# Altium PCB GRLV_Double_30v_v0.3.PcbDoc
Units mil, origin at the board's own origin, x right, y up, seen from the top; angles counter-clockwise.
Board outline 6000 x 4000 mil, 2 copper layers (Top Layer, Bottom Layer); 88 components, 45 nets, 217 pads, 0 vias.
Unrouted connection lines stored in the file: 142.
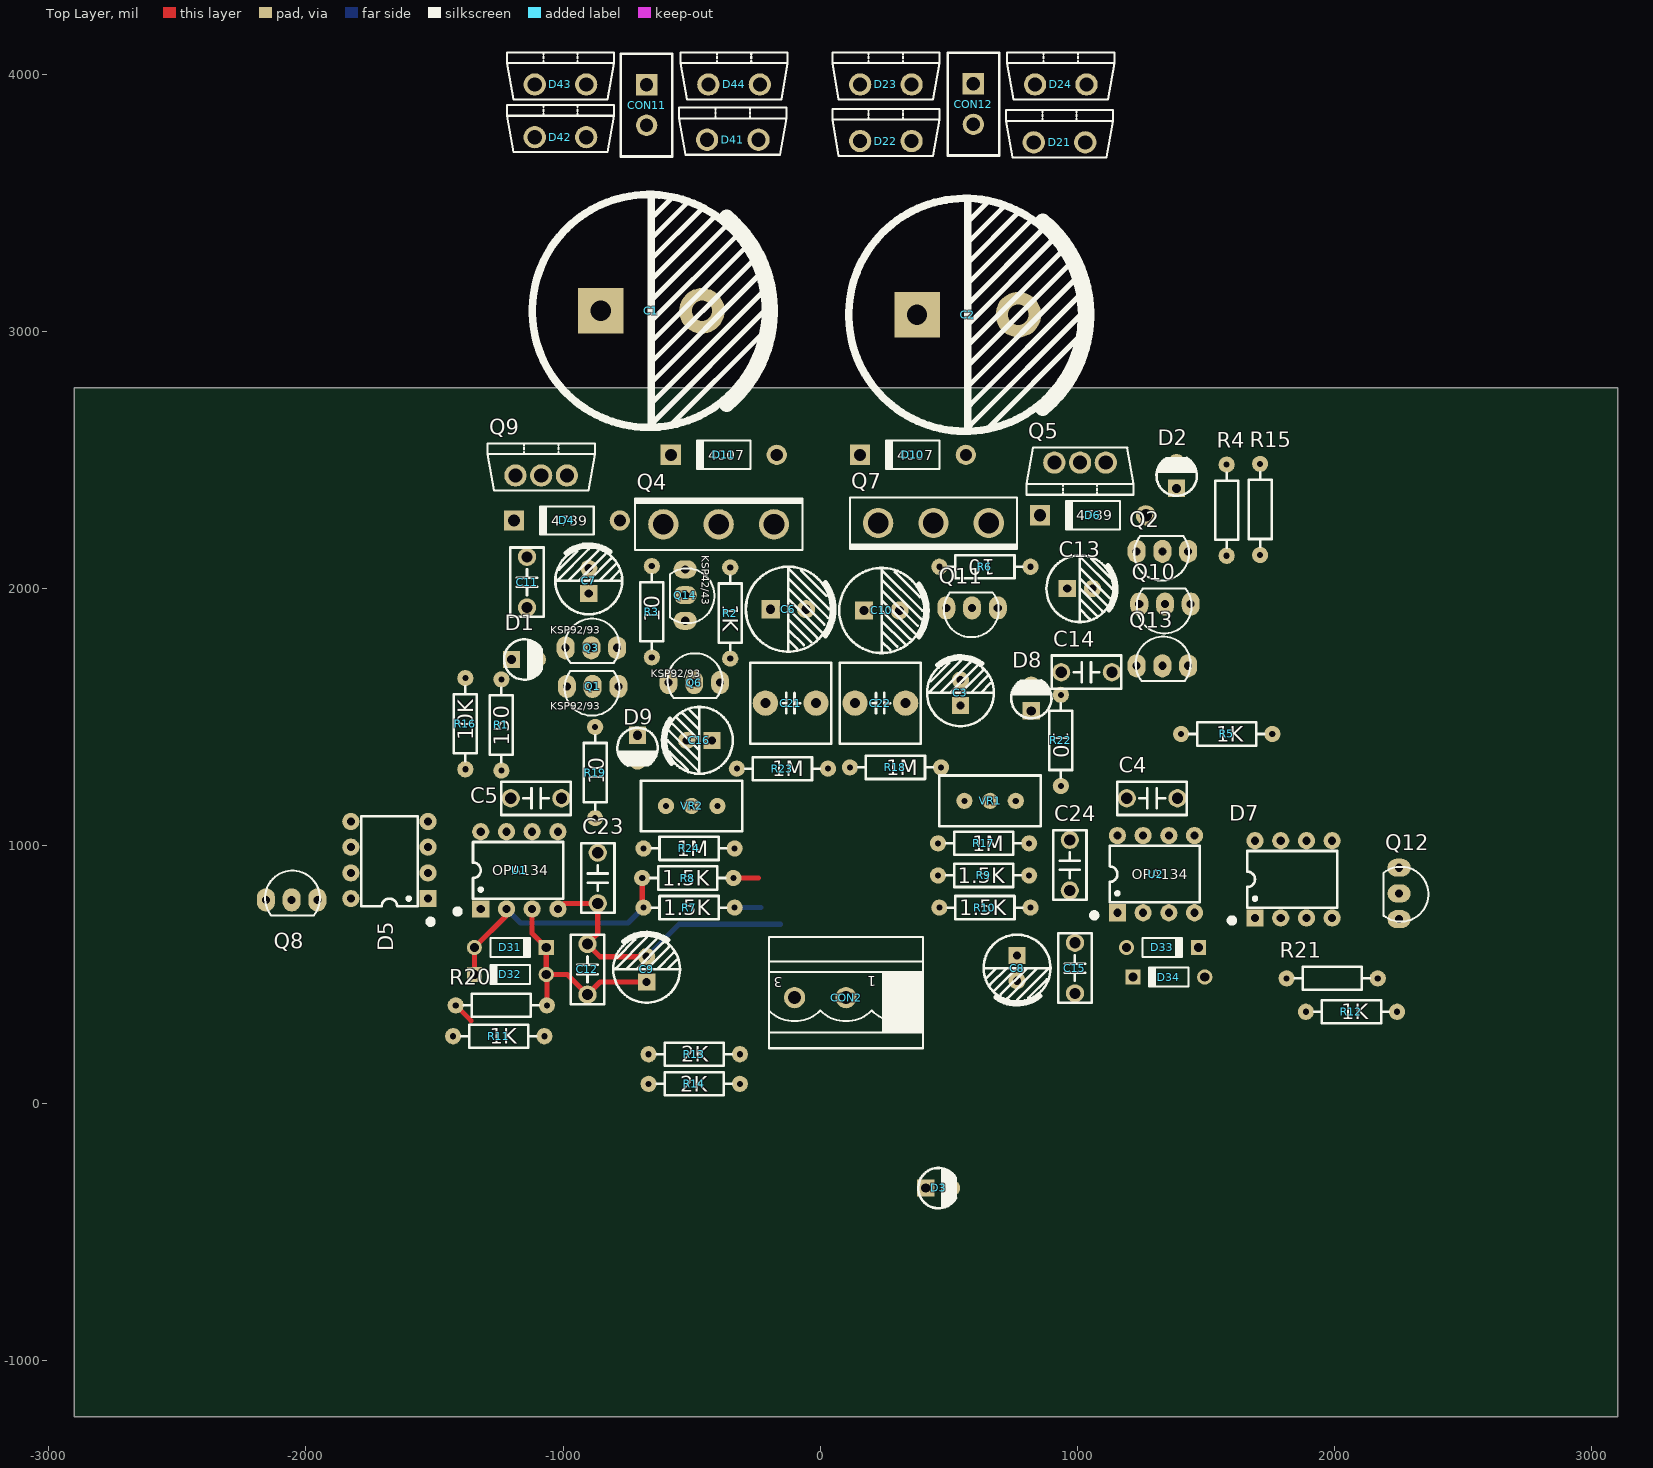
[diagram p0: Top Layer view]
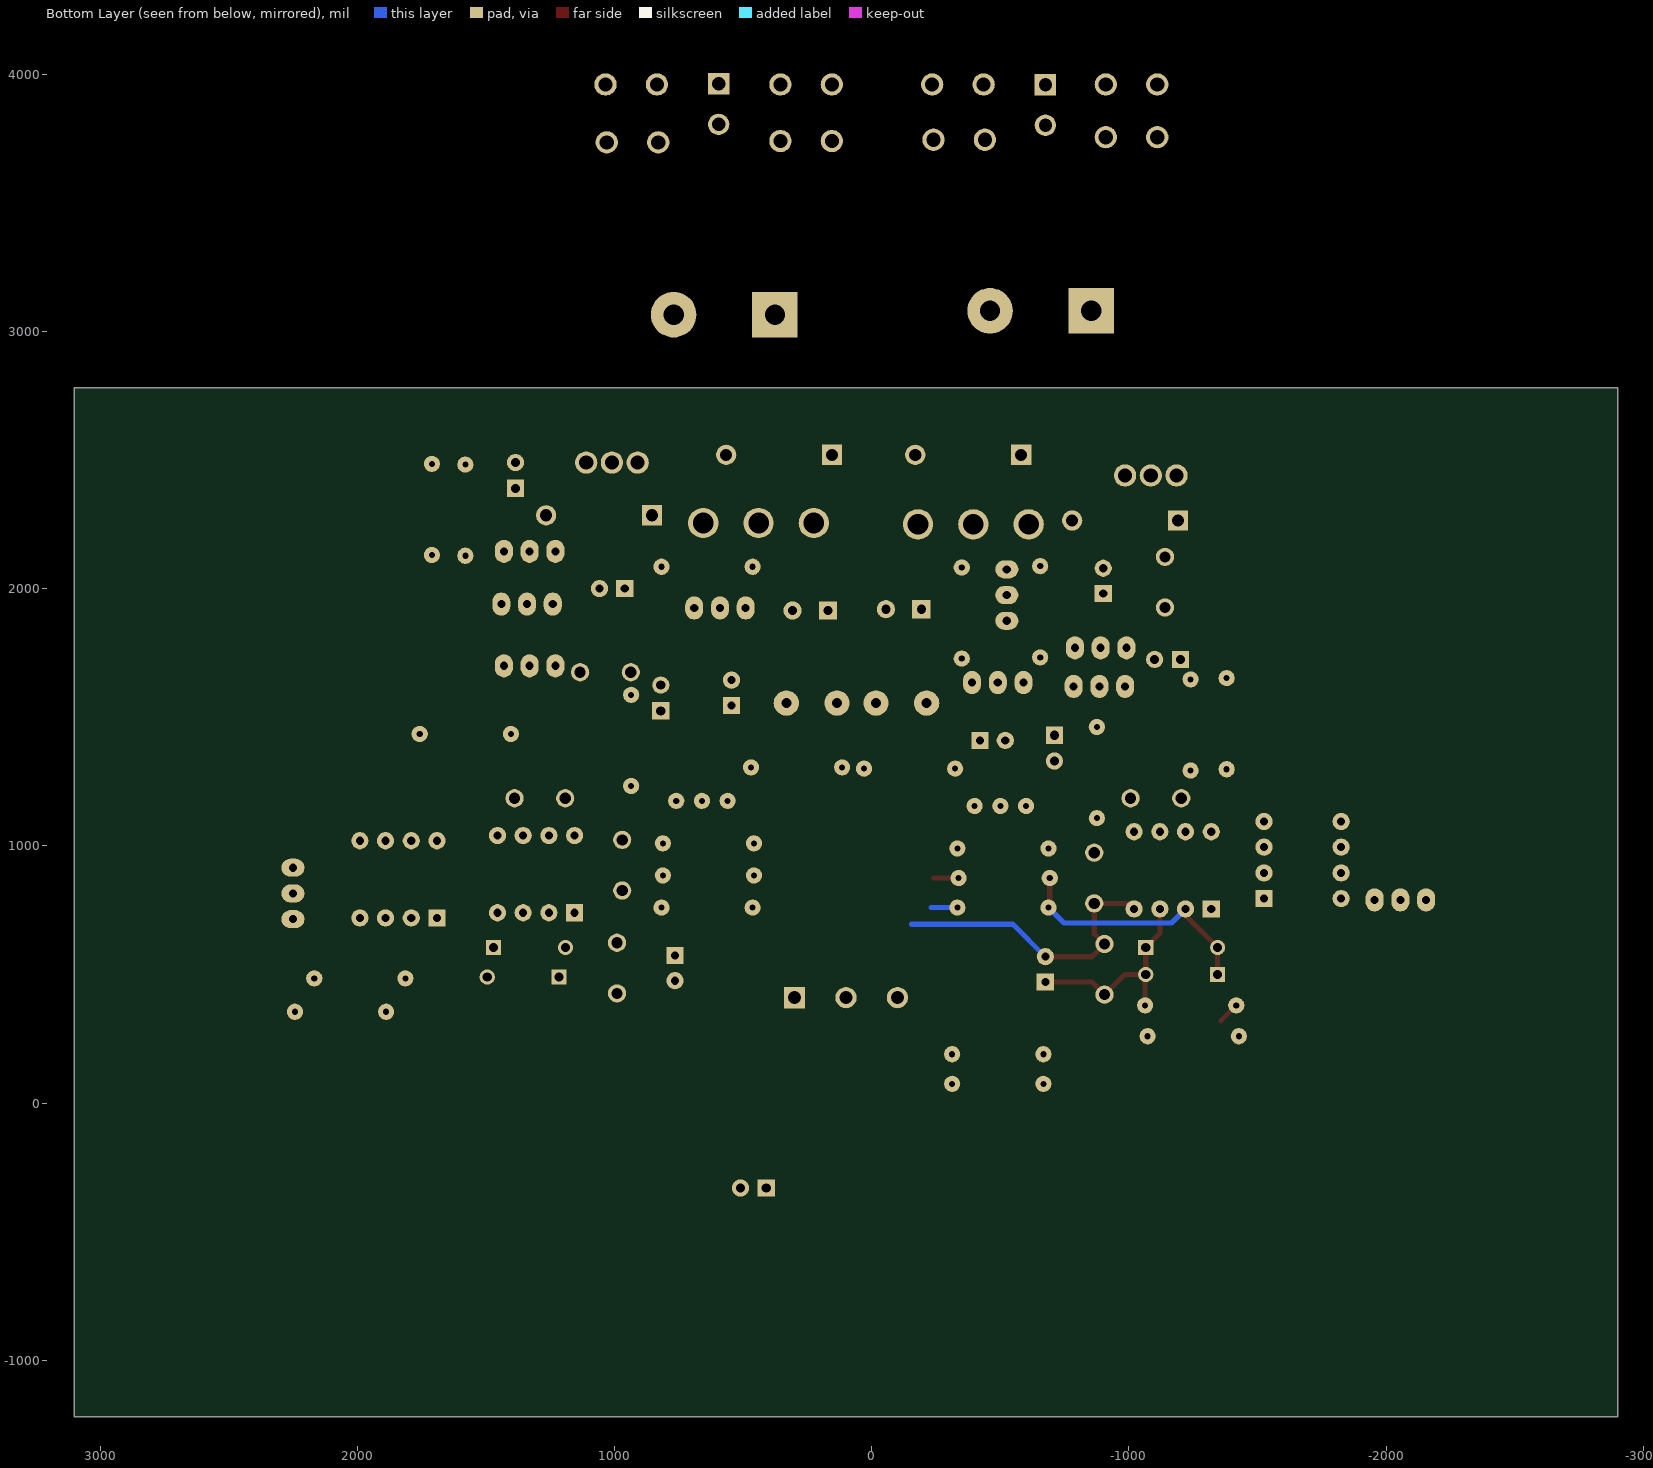
[diagram p1: Bottom Layer view, seen from below]

## Layer stack, top to bottom
Top Solder: solder mask 0.4, Solder Resist, Dk 3.5
Top Layer: signal copper 1.4
Dielectric 1: dielectric 12.6, FR-4, Dk 4.8
Bottom Layer: signal copper 1.4
Bottom Solder: solder mask 0.4, Solder Resist, Dk 3.5

## Board outline
-2900,-1220 3100,-1220 3100,2780 -2900,2780

## Design rules (kind name [scope] priority, off if disabled: settings)
Clearance [All] p1: gap=10 ignorepadtopadclearanceinfootprint=FALSE except(0: Arc-Hole Track-Hole SMDPad-Hole THPad-Hole Via-Hole Fill-Hole Poly-Hole Region-Hole Text-Hole)
PolygonConnect [All] p1: connectstyle=Relief reliefconductorwidth=10 reliefentries=4 polygonreliefangle="90 Angle" airgapwidth=10
RoomDefinition GRLV_double_30v_v0.3 [InComponentClass('GRLV_double_30v_v0.3')] p1: confinementstyle=ConfineIn formatcopy=TRUE lockcomponents=FALSE outline 3145,-1160 19565,-1160 19565,1930 3145,1930
RoutingVias [All] p1: holewidth=28 width=50 viastyle="Through Hole" minholewidth=28 minwidth=50 maxholewidth=28 maxwidth=50
SolderMaskExpansion [All] p1: expansion=4
Width [All] p1: maxlimit=100 minlimit=10 preferedwidth=20
30 further rules are at their usual default settings.

## Components (designator, comment, footprint, x,y, rotation, side; value= is the part's Value field where it differs from the comment)
C1 "4700UF/35V" "CAP 10*22*31.5" -656.85,3080 r0 top
C2 "4700UF/35V" "CAP 10*22*31.5" 573.15,3065 r0 top
C3 "10UF/16V" "CAP 2.5*6.3*7" 545,1595 r90 top
C4 "47pF/275V" "CBB 6.3*6.3*5" 1290,1185 r0 top
C5 "47pF/275V" "CBB 6.3*6.3*5" -1105,1185 r180 top
C6 "10UF/16V" "CAP 3.5*8*11.5" -123.9,1920 r0 top
C7 "10UF/16V" "CAP 2.5*6.3*11.2" -900,2030 r90 top
C8 "10UF/16V" "CAP 2.5*6.3*7" 765,525 r270 top
C9 "10UF/16V" "CAP 2.5*6.3*7" -675,520 r90 top
C10 "10UF/16V" "CAP 3.5*8*11.5" 238.9,1915 r0 top
C11 "0.1uF/275V" "CBB 6.3*6.3*5" -1140,2025 r90 top
C12 "0.1uF/275V" "CBB 6.3*6.3*5" -905,520 r90 top
C13 "10UF/16V" "CAP 2.5*6.3*11.2" 1009.21,2000 r0 top
C14 "0.1uF/275V" "CBB 6.3*6.3*5" 1035,1675 r0 top
C15 "0.1uF/275V" "CBB 6.3*6.3*5" 990,525 r90 top
C16 "10UF/16V" "CAP 2.5*6.3*7" -470,1410 r180 top
C21 "4.7uf/63v" "CBB 7.2*7.2*13" -115,1555 r0 top
C22 "4.7uf/63v" "CBB 7.2*7.2*13" 233.43,1555 r0 top
C23 "0.01uF/275V" "CBB 6.3*6.3*5" -865,875 r90 top value=0.01uF
C24 "0.01uF/275V" "CBB 6.3*6.3*5" 970,925 r90 top value=0.01uF
CON2 "EDG5.08-3P" HX5.08-3S 300,410 r180 top
CON11 "AC220-2" HX4.0-2XS -675,3880 r270 top
CON12 "AC220-2" HX4.0-2XS 595,3883.74 r270 top
D1 "ValueValueAux" "LED 3MM-R" -1150,1725 r0 top
D2 "ValueValueAux" "LED 3MM-R" 1385,2440 r90 top
D3 "ValueValueAux" "LED 3MM-R" 460,-330 r0 top
D4 "4739" DO-41 -985,2265 r180 top
D5 "LT1021-10-2P" DIP8-300_MH -1675,945 r180 top
D6 "4739" DO-41 1060,2285 r180 top
D7 "LT1021-10-2P" DIP8-300_MH 1840,870 r90 top
D8 "ValueValueAux" "LED 3MM-R" 820,1575 r90 top
D9 "ValueValueAux" "LED 3MM-R" -710,1380 r270 top
D10 "4007" DO-41 360,2520 r180 top
D11 "4007" DO-41 -375,2520 r180 top
D21 "VS-HFA08TB60-M3" TO220AC 830,3735 r0 top
D22 "VS-HFA08TB60-M3" TO220AC 155,3740 r0 top
D23 "VS-HFA08TB60-M3" TO220AC 155,3960 r0 top
D24 "VS-HFA08TB60-M3" TO220AC 835,3960 r0 top
D31 "1N914" DO-35 -1205,605 r0 top
D32 "1N914" DO-35 -1205,500 r180 top
D33 "1N914" DO-35 1330.24,605 r0 top
D34 "1N914" DO-35 1355,490 r180 top
D41 "VS-HFA08TB60-M3" TO220AC -440,3745 r0 top
D42 "VS-HFA08TB60-M3" TO220AC -1110,3755 r0 top
D43 "VS-HFA08TB60-M3" TO220AC -1110,3960 r0 top
D44 "VS-HFA08TB60-M3" TO220AC -435,3960 r0 top
Q1 "KSP92/93" TO92A -785,1620 r270 top
Q2 "KSP42/43" TO92A 1430,2145 r270 top
Q3 "KSP92/93" TO92A -990,1770 r90 top
Q4 "MJW21194" TO247V -395,2250 r0 top
Q5 "MJF15031" TO220V 1110,2490 r180 top
Q6 "KSP92/93" TO92A -590,1635 r90 top
Q7 "MJW21193" TO247V 440,2255 r180 top
Q8 "DN2540" TO92A -2155,790 r90 top
Q9 "MJF15030" TO220V -1185,2440 r0 top
Q10 "KSP42/43" TO92A 1440,1940 r270 top
Q11 "KSP42/43" TO92A 690,1925 r270 top
Q12 "DN2540" TO92A 2250,915 r0 top
Q13 "KSP92/93" TO92A 1230,1700 r90 top
Q14 "KSP42/43" TO92A -525,2075 r0 top
R1 "150" "RS 1/4W" -1240,1470 r90 top
R2 "1K" "RS 1/4W" -350,1905 r270 top
R3 "10" "RS 1/4W" -655,1910 r270 top
R4 "150" "RS 1/4W" 1580,2305 r90 top
R5 "1K" "RS 1/4W" 1580,1435 r0 top
R6 "10" "RS 1/4W" 640,2085 r0 top
R7 "1.5K" "RS 1/4W" -510,760 r0 top
R8 "1.5K" "RS 1/4W" -515,875 r180 top
R9 "1.5K" "RS 1/4W" 635,885 r180 top
R10 "1.5K" "RS 1/4W" 640,760 r0 top
R11 "1K" "RS 1/4W" -1250,260 r180 top
R12 "1K" "RS 1/4W" 2065,355 r0 top
R13 "2K" "RS 1/4W" -490,190 r180 top
R14 "2K" "RS 1/4W" -490,75 r0 top
R15 "10K" "RS 1/4W" 1710,2307.83 r90 top
R16 "10K" "RS 1/4W" -1380,1475 r90 top
R17 "1M" "RS 1/4W" 635,1010 r180 top
R18 "1M" "RS 1/4W" 292.17,1305 r0 top
R19 "10" "RS 1/4W" -875,1285 r270 top
R20 "500" "RS 1/4W" -1240,380 r180 top
R21 "500" "RS 1/4W" 1990,485 r180 top
R22 "10" "RS 1/4W" 935,1410 r270 top
R23 "1M" "RS 1/4W" -147.17,1300 r0 top
R24 "1M" "RS 1/4W" -510,990 r180 top
U1 "OPA134" DIP8-300_MH -1170,905 r90 top
U2 "OPA134" DIP8-300_MH 1305,890 r90 top
VR1 "VR-W" "RS 1/2W-VR" 660,1175 r0 top value=100K
VR2 "VR-W" "RS 1/2W-VR" -500,1155 r0 top value=100K

## Footprints (in the part's own frame and the unit in brackets; to place one, negate y for a bottom-side part, rotate by r counter-clockwise, add the part's x,y. Pads: shape width x height; smd on the part's side, far side on the other; paste and mask are expansions set on the pad)
"CAP 2.5*6.3*7" [mm] "脚距2.5mm直径6.3mm高度7mm"
  rect 1.7x1.7 hole 0.8: 1(-1.25,0)
  round 1.7 hole 0.8: 2(1.25,0)
  silkscreen extent -3.3,-3.3 3.56,3.3, body extent -3.15,-3.15 3.16,3.15, height 7.03
"CAP 2.5*6.3*11.2" [mm] "脚距2.5mm直径6.3mm高度11.2mm"
  rect 1.7x1.7 hole 0.8: 1(-1.25,0)
  round 1.7 hole 0.8: 2(1.25,0)
  silkscreen extent -3.3,-3.3 3.56,3.3, body extent -3.15,-3.15 3.16,3.15, height 11.23
"CAP 3.5*8*11.5" [mm] "脚距3.5mm直径8mm高度11.5mm"
  rect 1.8x1.8 hole 0.9: 1(-1.75,0)
  round 1.8 hole 0.9: 2(1.75,0)
  silkscreen extent -4.2,-4.2 4.5,4.2, body extent -4,-4 4.01,4, height 11.53
"CAP 10*22*31.5" [mm] "脚距10mm直径22mm高度31.5mm"
  rect 4.5x4.5 hole 2: 1(-5,0)
  round 4.5 hole 2: 2(5,0)
  silkscreen extent -11.74,-11.51 11.74,11.49, body extent -11,-11 11.01,11, height 31.53
"CBB 6.3*6.3*5" [mm] "脚距5mm高6.3mm厚3mm"
  round 1.8 hole 1.1: 1(-2.5,0) 2(2.5,0)
  silkscreen extent -3.43,-1.65 3.43,1.65, body extent -3.15,-1.5 3.15,1.5, height 6.8
"CBB 7.2*7.2*13" [mm] "脚距5mm高13mm厚7.2mm"
  round 2.5 hole 1: 1(-2.5,0) 2(2.5,0)
  silkscreen extent -4,-4 4,4, body extent -4,-4 4,4, height 17.53
DIP8-300_MH [mm] "带底座 9.4*7.6*3.8(长宽高）"
  rect 1.7x1.7 hole 0.8: 1(-3.81,3.81)
  round 1.7 hole 0.8: 2(-3.81,1.27) 3(-3.81,-1.27) 4(-3.81,-3.81) 5(3.81,-3.81) 6(3.81,-1.27) 7(3.81,1.27) 8(3.81,3.81)
  silkscreen extent -4.32,-4.32 2.79,6.35, body extent -5,-5.19 5,5.19, height 7.7
DO-35 [mm] "Diode, Axial; Body 3.8 x 1.9 mm (LxDia. max), Lead Dia. 0.53 mm (max)"
  round 1.5 hole 0.9: 1(-3.55,0)
  rect 1.5x1.5 hole 0.9: 2(3.55,0)
  silkscreen extent -1.95,-0.95 2.05,0.95
DO-41 [mm] "Diode, Axial; Body 5.2 x 2.7 mm (LxDia. max), Lead Dia. 0.86 mm (max)"
  round 2 hole 1.2: 1(-5.23,0)
  rect 2x2 hole 1.2: 2(5.23,0)
  silkscreen extent -2.65,-1.4 2.75,1.4
HX4.0-2XS [mm]
  rect 2.1x2.1 hole 1.3: 1(-2,0)
  round 2.1 hole 1.3: 2(2,0)
  silkscreen extent -5.08,-2.54 5.08,2.54
HX5.08-3S [mm]
  rect 2.1x2.1 hole 1.3: 1(0,0)
  round 2.1 hole 1.3: 2(5.08,0) 3(10.16,0)
  silkscreen extent -2.54,-6 12.7,5, body extent -2.5,-5.5 12.5,2.5, height 11
"LED 3MM-R" [mm] "红色3mm直插LED"
  rect 1.7x1.7 hole 0.9: 1(-1.27,0)
  round 1.7 hole 0.9: 2(1.27,0)
  silkscreen extent -2.01,-2 1.72,1.98, body extent -1.95,-1.95 1.64,1.95, height 5.55
"RS 1/2W-VR" [mm] "直插3脚顶调可调电阻，脚距2.54mm，长10mm*宽5mm*高10mm"
  round 1.6 hole 0.6: 1(-2.54,0) 2(2.54,0) 3(0,0)
  silkscreen extent -5,-2.5 5,2.5
"RS 1/4W" [mm] "直插色环电阻，脚距9mm，直径2.3mm"
  round 1.6 hole 0.6: 1(-4.5,0) 2(4.5,0)
  silkscreen extent -3.68,-1.14 3.68,1.14, body extent -4.72,-1.16 4.73,1.16, height 2.32
TO92A [mil]
  oval 90x70 hole 31.5: 1(0,0) 2(0,-100) 3(0,-200)
  silkscreen extent -60,-209 114,4
TO220AC [mm]
  round 2.2 hole 1.397: 1(0,0) 2(5.08,0)
  silkscreen extent -2.75,-1.48 7.83,3.18
TO220V [mm]
  round 2.2 hole 1.397: 1(0,0) 2(2.54,0) 3(5.08,0)
  silkscreen extent -2.75,-1.48 7.83,3.18
TO247V [mm]
  round 3 hole 2.032: 1(-5.461,0) 2(0,0) 3(5.461,0)
  silkscreen extent -8.26,-2.54 8.25,2.54

## Part data
C1 C2 C3 C6 C7 C8 C9 C10 C13 C16: library part C-CAP, "直插电解电容", BOM名称=直插电解电容, 学习资源=www.ooocke.com, 版权归属=源创客
C4 C5 C11 C12 C14 C15 C23 C24: library part C-CBB, "CBB电容", BOM名称=CBB电容, 学习资源=www.ooocke.com, 版权归属=源创客
C21 C22: library part C-MKS, "MKS薄膜电容"
D1 D2 D3 D8 D9: library part LED, "直插式LED"
D4 D6: library part 1N4739, "9.1V/1W稳压管"
D5 D7: "10V Precision Reference 2 Pin Config"
D10 D11: library part 1N4007, "整流二极管", BOM名称=整流二极管, 学习资源=www.ooocke.com, 版权归属=源创客
D21 D22 D23 D24 D41 D42 D43 D44: "Ultrafast Soft Recovery Diado 8A 600V"
D31 D32 D33 D34: "高速开关管 1V/0.25W"
Q1 Q3 Q6 Q13: "High Voltage PNP Transistor"
Q2 Q10 Q11 Q14: "High Voltage NPN Transistor"
Q4 Q9: "Power NPN Transistor"
Q5 Q7: "Power PNP Transistor"
Q8 Q12: "N沟道耗尽型DMOS场效应管 400V/150ma"
R1 R2 R3 R4 R5 R6 R7 R8 R9 R10 R11 R12 R13 R14 R15 R16 R17 R18 R19 R20 R21 R22 R23 R24: library part R-CRR, "直插色环电阻", BOM名称=色环电阻, 学习资源=www.ooocke.com, 版权归属=源创客
U1 U2: library part OPA134PA
VR1 VR2: "直插可调电阻-顶调"

## Nets (pads, with @x,y where several pads share a name; then routed paths per layer and width w, separated by ;. In a path a pad name is that pad's centre, name@x,y a point inside that pad or via, vN(x,y) a via of type N, cw(c..) or ccw(c..) an arc to the next point about the centre after c; other vN are vias at no path point)
GND: C1.2 C2.1 C6.2 C8.1 C9.2 C10.1 C12.2 C15.2 C21.2 C22.1 C23.1 C24.1 CON2.2 D5.4 D7.6 D8.1 D9.2 D22.1 D23.1 D41.2 D44.2 Q6.3 Q11.3 R2.2 R5.1 R7.2 R10.1 R18.1 R23.2 U1.4 U2.7 | length 1264
  Top Layer w20: U1.4 -998.43,776.57 C23.1 -865,658.43 C12.2 -855.79,569.21 C9.2
  Bottom Layer w20: C9.2 -549.21,695 -155,695 ; R7.2 -230,760
NetC1_1: C1.1 D1.1 D11.2 D42.1 D43.1 Q4.2 Q9.2 R1.1 R16.1
NetC2_2: C2.2 D2.2 D10.1 D21.2 D24.2 Q5.2 Q7.2 R4.2 R15.2
NetC3_1: C3.1 C4.2 D33.1 D34.2 R9.1 R10.2 U2.2 VR1.3
NetC3_2: C3.2 C10.2 C22.2 C24.2 CON2.1 D10.2 Q7.3 Q12.2 R9.2 R12.2 R14.2 R17.2 U2.4
NetC4_1: C4.1 R22.2 U2.6
NetC5_1: C5.1 R19.2 U1.6
NetC5_2: C5.2 C16.2 D31.1 D32.2 R7.1 R8.2 U1.2 VR2.3 | length 1004.2
  Top Layer w20: D32.2 D31.1 -1220,729.76 U1.2 ; R8.2 -692.17,765 R7.1
  Bottom Layer w20: U1.2 -1165,700 -747.17,700 R7.1
NetC6_1: C6.1 C16.1 C21.1 C23.2 CON2.3 D11.1 Q4.3 Q8.3 R8.1 R13.2 R24.1 U1.7 | length 97.8
  Top Layer w20: R8.1 -240,875
NetC7_1: C7.1 C11.1 D4.2 Q3.3 Q9.1
NetC7_2: C7.2 C11.2 D4.1 R3.1
NetC8_2: C8.2 C15.1 D33.2 D34.1 R21.1 U2.3
NetC9_1: C9.1 C12.1 D31.2 D32.1 R20.1 U1.3 | length 841.8
  Top Layer w20: U1.3 -1120,659.76 D31.2 D32.1 ; R20.1 -1062.83,497.6 D32.1 ; C9.1 -855.79,470.79 C12.1 -983.43,500 D32.1
NetC13_1: C13.1 C14.1 D6.2 R6.2
NetC13_2: C13.2 C14.2 D6.1 Q5.1 Q10.3
NetCON11_1: CON11.1 D43.2 D44.1
NetCON11_2: CON11.2 D41.1 D42.2
NetCON12_1: CON12.1 D23.2 D24.1
NetCON12_2: CON12.2 D21.1 D22.2
NetD1_2: D1.2 Q1.1
NetD2_1: D2.1 Q2.1
NetD3_1: D3.1 R13.1
NetD3_2: D3.2 R14.1
NetD5_6: D5.6 Q8.2 R11.2 R20.2 | length 84.9
  Top Layer w20: R20.2 -1357.17,320
NetD7_4: D7.4 Q12.3 R21.2
NetD8_2: D8.2 Q13.2 R15.1
NetD9_1: D9.1 Q14.2 R16.2
NetQ1_2: Q1.2 Q1.3 Q3.2 Q14.3
NetQ2_2: Q2.2 Q2.3 Q10.2 Q13.3
NetQ3_1: Q3.1 R1.2
NetQ4_1: Q4.1 Q9.3
NetQ5_3: Q5.3 Q7.1
NetQ6_1: Q6.1 R3.2
NetQ6_2: Q6.2 R19.1
NetQ8_1: Q8.1 R11.1
NetQ10_1: Q10.1 R4.1
NetQ11_1: Q11.1 R6.1
NetQ11_2: Q11.2 R22.1
NetQ12_1: Q12.1 R12.1
NetQ13_1: Q13.1 R5.2
NetQ14_1: Q14.1 R2.1
NetR17_1: R17.1 VR1.2
NetR18_2: R18.2 VR1.1
NetR23_1: R23.1 VR2.2
NetR24_2: R24.2 VR2.1
pads on no net: D5.1 D5.2 D5.3 D5.5 D5.7 D5.8 D7.1 D7.2 D7.3 D7.5 D7.7 D7.8 U1.1 U1.5 U1.8 U2.1 U2.5 U2.8

## Text inside footprints (layer, text, board x,y; h text height)
CON2: Top Overlay "1" at 217,493 h40 r180; Top Overlay "3" at -146,490 h40 r180